# Altium PCB K06-43.PcbDoc
Units mm, origin at the board's own origin, x right, y up, seen from the top; angles counter-clockwise.
Board outline 23.03 x 72.61 mm, 2 copper layers (Top Layer, Bottom Layer); 64 components, 50 nets, 174 pads, 0 vias.
Unrouted connection lines stored in the file: 121.
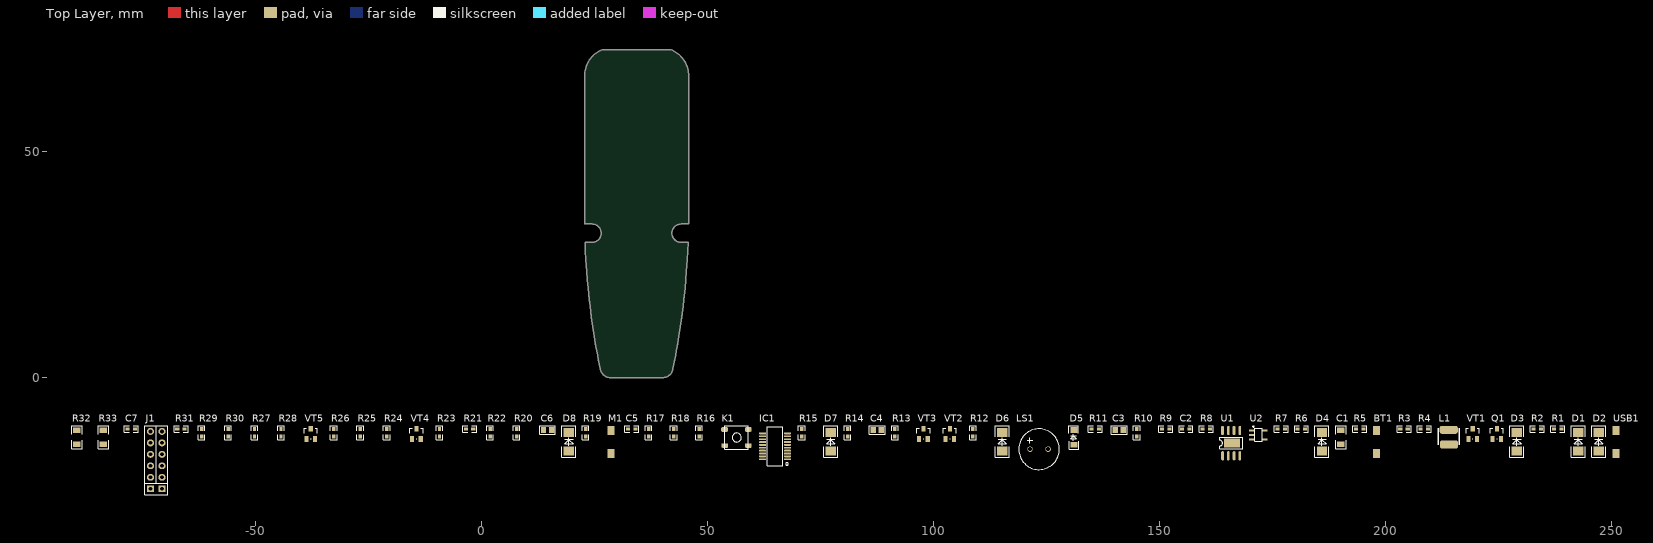
[diagram p0: Top Layer view]
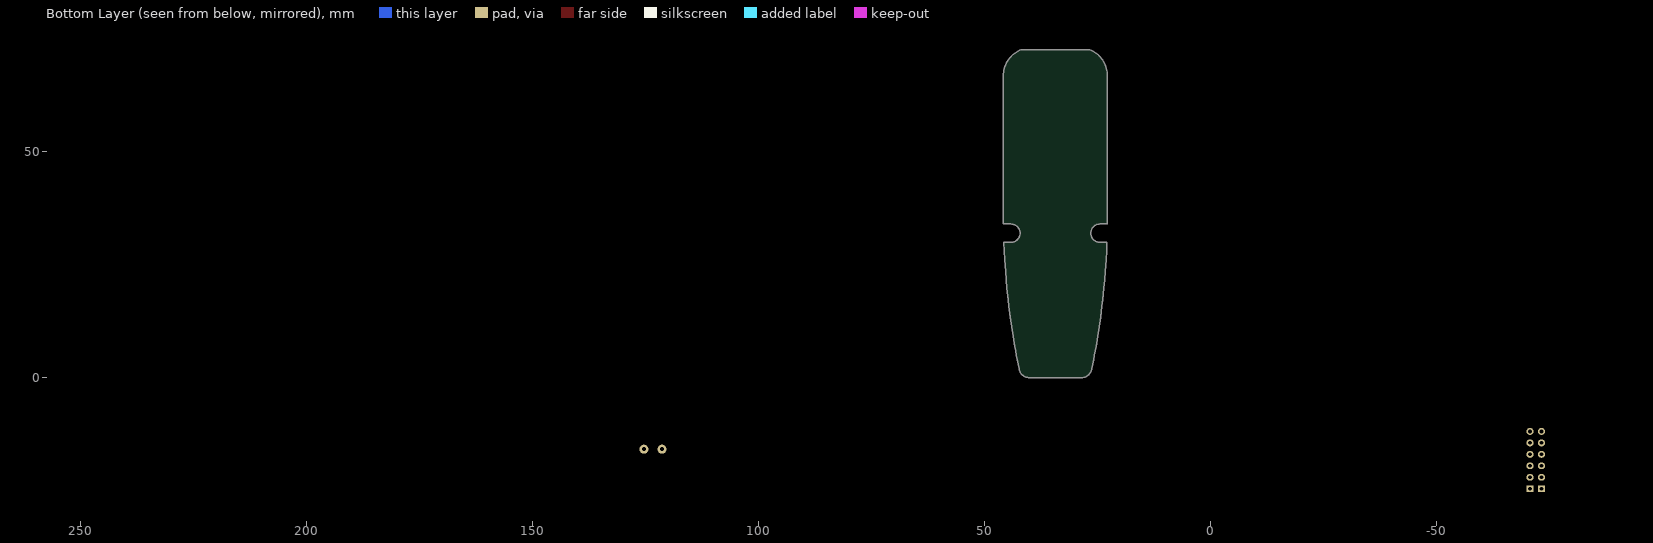
[diagram p1: Bottom Layer view, seen from below]

## Layer stack, top to bottom
Top Solder: solder mask 0.0102, Solder Resist, Dk 3.5
Top Layer: signal copper 0.0356
Dielectric 1: dielectric 0.32, FR-4, Dk 4.8
Bottom Layer: signal copper 0.0356
Bottom Solder: solder mask 0.0102, Solder Resist, Dk 3.5

## Board outline
24.889,9.126 cw(c24.952,9.136) 24.889,9.127 24.557,11.288 cw(c24.62,11.298) 24.557,11.289 24.26,13.398 cw(c24.323,13.407) 24.26,13.399 ccw(c24.323,13.407) 24.26,13.398 24.26,13.399 23.96,15.754 cw(c24.023,15.762) 23.96,15.755 23.783,17.285 23.783,17.286 ccw(c23.846,17.293) 23.783,17.285 23.783,17.286 cw(c23.846,17.293) 23.783,17.287 23.783,17.286 23.783,17.287 23.525,19.768 23.525,19.769 23.525,19.768 cw(c23.588,19.775) 23.525,19.769 23.352,21.664 cw(c23.416,21.67) 23.352,21.666 23.2,23.573 cw(c23.264,23.579) 23.2,23.574 cw(c23.264,23.579) 23.2,23.575 23.032,26.088 cw(c23.096,26.092) 23.032,26.089 22.927,28.046 cw(c22.991,28.049) 22.927,28.047 22.85,29.85 cw(c22.914,29.853) 22.85,29.85 cw(c22.914,29.853) 22.914,29.917 24.395,29.917 ccw(c24.395,31.953) 26.431,31.953 ccw(c24.395,31.953) 24.395,33.989 22.809,33.989 cw(c22.809,34.053) 22.745,34.053 22.745,34.052 22.745,34.053 22.731,36.252 cw(c22.795,36.253) 22.731,36.253 22.731,66.753 cw(c22.795,66.753) 22.731,66.755 cw(c28.995,66.753) 26.723,72.59 cw(c26.746,72.531) 26.746,72.595 41.743,72.595 cw(c41.743,72.531) 41.766,72.59 cw(c39.495,66.753) 45.758,66.753 45.758,36.253 cw(c45.695,36.253) 45.758,36.252 45.744,34.053 ccw(c45.68,34.053) 45.744,34.053 45.744,34.052 45.744,34.053 cw(c45.68,34.053) 45.68,33.989 44.095,33.989 ccw(c44.095,31.953) 44.095,29.917 45.575,29.917 cw(c45.575,29.853) 45.639,29.853 cw(c45.575,29.853) 45.639,29.85 cw(c45.575,29.853) 45.639,29.85 45.562,28.047 cw(c45.498,28.049) 45.562,28.046 45.457,26.089 cw(c45.393,26.092) 45.457,26.088 cw(c45.393,26.092) 45.457,26.088 45.289,23.575 45.289,23.574 ccw(c45.226,23.579) 45.289,23.575 45.289,23.574 cw(c45.226,23.579) 45.289,23.573 45.137,21.666 45.137,21.665 45.137,21.666 cw(c45.073,21.67) 45.137,21.664 44.965,19.769 cw(c44.901,19.775) 44.965,19.768 44.965,19.769 44.965,19.768 44.707,17.287 44.707,17.286 44.707,17.287 cw(c44.643,17.293) 44.707,17.286 44.529,15.755 cw(c44.466,15.762) 44.529,15.754 44.229,13.399 cw(c44.166,13.407) 44.229,13.398 ccw(c44.166,13.407) 44.229,13.399 44.229,13.398 43.932,11.289 cw(c43.869,11.298) 43.932,11.288 ccw(c43.869,11.298) 43.932,11.289 43.932,11.288 43.6,9.127 cw(c43.537,9.136) 43.6,9.126 43.227,6.894 cw(c43.164,6.904) 43.227,6.893 43.064,5.968 cw(c43.001,5.979) 43.064,5.968 cw(c43.001,5.979) 43.064,5.968 42.875,4.932 cw(c42.812,4.944) 42.875,4.932 cw(c42.812,4.944) 42.875,4.931 42.875,4.932 42.875,4.931 42.697,3.992 cw(c42.634,4.003) 42.697,3.991 ccw(c42.634,4.003) 42.697,3.991 42.697,3.992 42.697,3.991 42.495,2.953 42.495,2.952 ccw(c42.432,2.965) 42.495,2.953 42.495,2.952 cw(c42.432,2.965) 42.495,2.952 42.297,1.968 cw(c42.235,1.981) 42.297,1.968 cw(c42.235,1.981) 42.297,1.968 42.262,1.798 cw(c42.2,1.811) 42.262,1.797 ccw(c40.045,2.253) 42.262,1.798 42.262,1.797 cw(c40.045,2.253) 40.046,-0.011 cw(c40.045,2.253) 40.045,-0.011 ccw(c40.045,0.053) 40.046,-0.011 40.045,-0.011 28.445,-0.011 cw(c28.445,0.053) 28.443,-0.011 ccw(c28.445,2.253) 28.445,-0.011 28.443,-0.011 cw(c28.445,2.253) 26.227,1.797 cw(c26.289,1.811) 26.227,1.798 26.192,1.968 cw(c26.255,1.981) 26.192,1.968 25.994,2.952 cw(c26.057,2.965) 25.994,2.952 cw(c26.057,2.965) 25.994,2.953 25.792,3.991 cw(c25.855,4.003) 25.792,3.992 25.615,4.931 cw(c25.677,4.944) 25.615,4.932 ccw(c25.677,4.944) 25.615,4.932 25.615,4.931 25.615,4.932 25.426,5.968 cw(c25.488,5.979) 25.425,5.968 25.262,6.893 cw(c25.325,6.904) 25.262,6.894

## Design rules (kind name [scope] priority, off if disabled: settings)
Clearance [All vs InPolygon] p1: gap=0.6
Clearance Clearance_1 [All] p2: gap=0.254
ComponentClearance [All] p1 off: gap=0.254 collisioncheckmode=3 verticalgap=0.254 showdistances=FALSE
PolygonConnect [All] p1: connectstyle=Relief reliefconductorwidth=0.254 reliefentries=4 polygonreliefangle="90 Angle" airgapwidth=0.254
RoomDefinition K06-43 [InComponentClass('K06-43')] p1: confinementstyle=ConfineIn formatcopy=TRUE lockcomponents=FALSE outline -90.995,-26.086 255.841,-26.086 255.841,-7.899 -90.995,-7.899
RoutingVias [All] p1: holewidth=0.3 width=0.6 viastyle="Through Hole" minholewidth=0.3 minwidth=0.6 maxholewidth=0.3 maxwidth=0.6
SolderMaskExpansion [All] p1: expansion=0.102
Width [All] p1: maxlimit=3 minlimit=0.254 preferedwidth=0.254 minimp=50.000000 maximp=50.000000 favimp=50.000000
29 further rules are at their usual default settings.

## Components (designator, comment, footprint, x,y, rotation, side; value= is the part's Value field where it differs from the comment)
BT1 "Battery" BAT 197.98,-14.224 r90 top
C1 "22uF" 1206 190.081,-13.005 r90 top
C2 "C104" 0603 154.978,-11.379 r0 top
C3 "C104" 0805N 141.059,-11.582 r0 top
C4 "C105" 0805N 87.516,-11.582 r0 top
C5 "C104" 0603 32.347,-11.379 r0 top
C6 "C105" 0805N 14.541,-11.582 r0 top
C7 "C104" 0603 -78.397,-11.379 r0 top
D1 "SS24" DO-214AC 242.608,-14.173 r0 top
D2 "SS14" DO-214AC 247.18,-14.173 r0 top
D3 "A7" DO-214AC 229.044,-14.173 r0 top
D4 "SS14" DO-214AC 185.915,-14.173 r0 top
D5 "5.6V" 4148 130.975,-13.31 r90 top
D6 "A7" DO-214AC 115.126,-14.173 r0 top
D7 "A7" DO-214AC 77.203,-14.173 r0 top
D8 "A7" DO-214AC 19.266,-14.173 r0 top
IC1 "" QSOP20 64.884,-15.215 r0 top
J1 "" DIP254-6P -72.047,-18.263 r90 top
K1 "4*4*H" D4_SMT 56.401,-13.259 r0 top
L1 "47uH" CD4X 213.982,-13.183 r0 top
LS1 "Buzzer" buzzer-9.0 123.304,-15.85 r0 top
M1 "MOTOR" bat 28.613,-14.224 r90 top
Q1 "8550" sot-23 224.599,-12.471 r0 top
R1 "0.5R" 0603 237.223,-11.379 r0 top
R2 "R510" 0603 232.727,-11.379 r0 top
R3 "R303" 0603 203.238,-11.379 r0 top
R4 "R103" 0603 207.734,-11.379 r0 top
R5 "0.5R" 0603 193.408,-11.379 r0 top
R6 "R104" 0603 180.53,-11.379 r0 top
R7 "R202" 0603 176.035,-11.379 r0 top
R8 "R103" 0603 159.474,-11.379 r0 top
R9 "R103" 0603 150.482,-11.379 r0 top
R10 "R103" 0603 144.92,-13.03 r90 top
R11 "R202" 0603 134.912,-11.379 r0 top
R12 "R103" 0603 108.674,-13.03 r90 top
R13 "R202" 0603 91.402,-13.03 r90 top
R14 "R202" 0603 80.937,-13.03 r90 top
R15 "R103" 0603 70.777,-13.03 r90 top
R16 "R103" 0603 48.095,-13.03 r90 top
R17 "R103" 0603 36.893,-13.03 r90 top
R18 "R103" 0603 42.481,-13.03 r90 top
R19 "R510" 0603 22.974,-13.03 r90 top
R20 "R510" 0603 7.683,-13.03 r90 top
R21 "R103" 0603 -3.543,-11.379 r0 top
R22 "R510" 0603 1.841,-13.03 r90 top
R23 "R510" 0603 -9.36,-13.03 r90 top
R24 "R510" 0603 -21.044,-13.03 r90 top
R25 "R510" 0603 -26.911,-13.03 r90 top
R26 "R510" 0603 -32.753,-13.03 r90 top
R27 "R510" 0603 -50.305,-13.03 r90 top
R28 "R103" 0603 -44.437,-13.03 r90 top
R29 "R103" 0603 -62.014,-13.03 r90 top
R30 "R510" 0603 -56.147,-13.03 r90 top
R31 "R103" 0603 -67.399,-11.379 r0 top
R32 "0.1R" 1206 -89.624,-13.005 r90 top
R33 "0.1R" 1206 -83.757,-13.005 r90 top
U1 "TP4056" ESOP-8 165.824,-14.503 r90 top
U2 "ME2188C50M5G" SOT-23-5 171.844,-12.7 r0 top
USB1 "USB5.15" BAT 250.965,-14.224 r90 top
VT1 "3401" SOT-23 219.266,-12.471 r0 top
VT2 "3401" SOT-23 103.569,-12.471 r0 top
VT3 "8050" SOT-23 97.727,-12.471 r0 top
VT4 "2302" sot-23 -14.465,-12.471 r0 top
VT5 "8050" SOT-23 -37.859,-12.471 r0 top

## Footprints (in the part's own frame and the unit in brackets; to place one, negate y for a bottom-side part, rotate by r counter-clockwise, add the part's x,y. Pads: shape width x height; smd on the part's side, far side on the other; paste and mask are expansions set on the pad)
0603 [mil]
  rect 35.43x30 smd: 1(0,0) 2(65,0)
  silkscreen extent -27,-29 94,29
0805N [mm]
  rect 1.2x1.4 smd: 1(-0.9,0) 2(0.9,0)
  silkscreen extent -1.75,-0.95 1.75,0.95
1206 [mm]
  rect 1.2x1.7 smd: 1(-1.778,0) 2(1.372,0)
  silkscreen extent -2.76,-1.17 2.35,1.17
4148 [mil]
  rect 50x60 smd: 1(-61,-1) 2(67,-1)
  silkscreen extent -99,-42 105,41
BAT [mm]
  rect 2x1.5 smd: 1(-2.553,0) 2(2.553,0)
bat [mm]
  rect 2x1.5 smd: 1(-2.553,0) 2(2.553,0)
buzzer-9.0 [mm]
  round 1.2 / inner round 2 / far side round 2 hole 0.9: 1(2,0) 2(-2,0)
  silkscreen extent -4.5,-4.5 4.5,4.5
CD4X [mm]
  rrect50% 4x1.75 smd: 1(0.013,-1.625) 2(-0.012,1.625)
  silkscreen extent -2.36,-1.73 2.34,1.96
D4_SMT [mm]
  rrect50% 1.5x1 smd: 1(-2.621,-1.773) 1(2.57,-1.773) 2(-2.672,1.773) 2(2.57,1.773)
  silkscreen extent -2.62,-2.57 2.58,2.63
DIP254-6P [mm]
  rect 1.5x1.6 hole 0.813: 1(-6.35,1.27) 12(-6.35,-1.27)
  oval 1.5x1.6 hole 0.813: 2(-3.81,1.27) 3(-1.27,1.27) 4(1.27,1.27) 5(3.81,1.27) 6(6.35,1.27) 7(6.35,-1.27) 8(3.81,-1.27) 9(1.27,-1.27) 10(-1.27,-1.27) 11(-3.81,-1.27)
  silkscreen extent -7.62,-2.54 7.62,2.54
DO-214AC [mm]
  rect 2.3x2 smd: 1(0,-2.07) 2(0,2.07)
  silkscreen extent -1.55,-3.49 1.55,3.49
ESOP-8 [mil]
  rect 78.74x137.8 smd: 0(0,-8)
  oval 80x24 smd: 1(-110,75) 2(-110,25) 3(-110,-25) 4(-110,-75) 5(110,-75) 6(110,-25) 7(110,25) 8(110,75)
  silkscreen extent -50,-100 50,100
QSOP20 [mm]
  oval 1.6x0.4 smd: 1(2.75,-2.857) 2(2.75,-2.222) 3(2.75,-1.587) 4(2.75,-0.952) 5(2.75,-0.317) 6(2.75,0.318) 7(2.75,0.953) 8(2.75,1.588) 9(2.75,2.223) 10(2.75,2.858) 11(-2.75,2.858) 12(-2.75,2.223) 13(-2.75,1.588) 14(-2.75,0.953) 15(-2.75,0.318) 16(-2.75,-0.317) 17(-2.75,-0.952) 18(-2.75,-1.587) 19(-2.75,-2.222) 20(-2.75,-2.857)
  silkscreen extent -1.75,-4.32 2.97,4.33, body extent -3.09,-4.37 3.1,4.37, height 1.73
sot-23 [mil]
  rect 36x50 smd: 1(-37.5,-45) 2(37.5,-45) 3(0.5,45)
  silkscreen extent -58,-40 58,50
SOT-23 [mil]
  rect 36x50 smd: 1(-37.5,-45) 2(37.5,-45) 3(0.5,45)
  silkscreen extent -58,-40 58,50
SOT-23-5 [mm]
  rect 1.3x0.45 smd: 1(-1.4,0.95) 2(-1.4,0) 3(-1.4,-0.95) 4(1.4,-0.95) 5(1.4,0.95)
  silkscreen extent -1.2,-1.44 0.81,1.95

## Part data
C1 C2 C3 C4 C5 C6 C7: library part CAP
D1 D2 D3 D4 D5 D7 D8: library part DIODE
D6: library part DIODE, "Diode"
IC1: library part MCU_1713
J1: library part DB6*2
K1: library part SW-PB
L1: library part L, "1.5A以上"
LS1: "Magnetic Transducer Buzzer"
M1 R1 R2 R3 R4 R5 R6 R7 R8 R9 R10 R11 R12 R13 R14 R15 R16 R17 R18 R19 R20 R21 R22 R23 R24 R25 R26 R27 R28 R29 R30 R31 R32 R33: library part RES2
Q1: library part 8550-SMT
U2: library part TP5303
USB1: library part USB2
VT1 VT2: library part "MOSFET P"
VT3 VT5: library part 8050-SMT
VT4: library part "MOSFET N"

## Nets (pads, with @x,y where several pads share a name; then routed paths per layer and width w, separated by ;. In a path a pad name is that pad's centre, name@x,y a point inside that pad or via, vN(x,y) a via of type N, cw(c..) or ccw(c..) an arc to the next point about the centre after c; other vN are vias at no path point)
+5V: C1.1 C4.1 D2.2 IC1.20 U2.2
+VIN: D1.1 R21.2 USB1.1
BAT+: BT1.1 D4.1 D6.2 LS1.1 R18.2 U1.5 VT2.3
GND: BT1.2 C1.2 C2.1 C3.1 C4.2 C5.1 C7.1 D5.1 IC1.1 K1.1 R8.2 R9.2 R10.1 R11.2 R12.2 R15.2 R29.1 R31.2 R32.1 R33.1 U1.0 U1.1 U1.3 U2.4 USB1.2 VT3.2 VT5.2
NetC6_1: C6.1 D8.1 M1.1 VT4.3
NetD1_2: D1.2 Q1.2 R3.1 R4.1 R6.2 VT1.2
NetD2_1: D2.1 L1.2 U2.5
NetD3_2: D3.2 D4.2 L1.1
NetD5_2: D5.2 R7.1
NetD6_1: D6.1 LS1.2 VT3.3
NetQ1_1: Q1.1 R4.2 R7.2
NetQ1_3: Q1.3 R6.1 R10.2 VT1.1
NetR1_2: R1.2 R5.2 U1.4
NetR2_2: R2.2 U2.1
NetR11_1: R11.1 U1.2
NetR12_1: R12.1 R14.2 VT2.1
NetR13_1: R13.1 R15.1 VT3.1
NetR21_1: R21.1 R29.2 VT5.1
NetR25_1: R25.1 R31.1 VT4.1
NetR28_1: R28.1 R32.2 R33.2 VT4.2
PIN_BEEP: IC1.18 R13.2
PIN_DIG1: IC1.2 J1.1 R16.1
PIN_DIG2: IC1.3 J1.12 R17.1
PIN_DIG3: IC1.4 J1.9
PIN_DIG4: IC1.5 J1.7
PIN_EN: IC1.19 R2.1 U1.8
PIN_IOV: C7.2 IC1.15 R28.2
PIN_KEY: K1.2 R16.2
PIN_M: IC1.14 R25.2
PIN_SEGA: IC1.13 R19.1
PIN_SEGB: IC1.12 R20.2
PIN_SEGC: IC1.11 R22.1
PIN_SEGD: IC1.10 R23.1
PIN_SEGE: IC1.9 R24.1
PIN_SEGF: IC1.8 R26.1
PIN_SEGG: IC1.7 R27.1
PIN_SEGM: IC1.6 R30.1
PIN_USB: R17.2 VT5.3
PIN_VBAT: C5.2 IC1.16 R18.1
PIN_VIN: C3.2 IC1.17 R3.2 R8.1
SEG_A: J1.2 R19.2
SEG_B: J1.11 R20.1
SEG_C: J1.10 R22.2
SEG_D: J1.4 R23.2
SEG_E: J1.5 R24.2
SEG_F: J1.3 R26.2
SEG_G: J1.6 R27.2
SEG_M: J1.8 R30.2
V+: C2.2 D3.1 D7.1 R1.1 R5.1 R9.1 R14.1 VT1.3
VDD: C6.2 D7.2 D8.2 M1.2 VT2.2
pads on no net: U1.6 U1.7 U2.3